# Altium PCB POWER.PcbDoc
Units mil, origin at the board's own origin, x right, y up, seen from the top; angles counter-clockwise.
Board outline 1065 x 2395 mil, 2 copper layers (Top Layer, Bottom Layer); 27 components, 25 nets, 139 pads, 8 vias.
Unrouted connection lines stored in the file: 2.
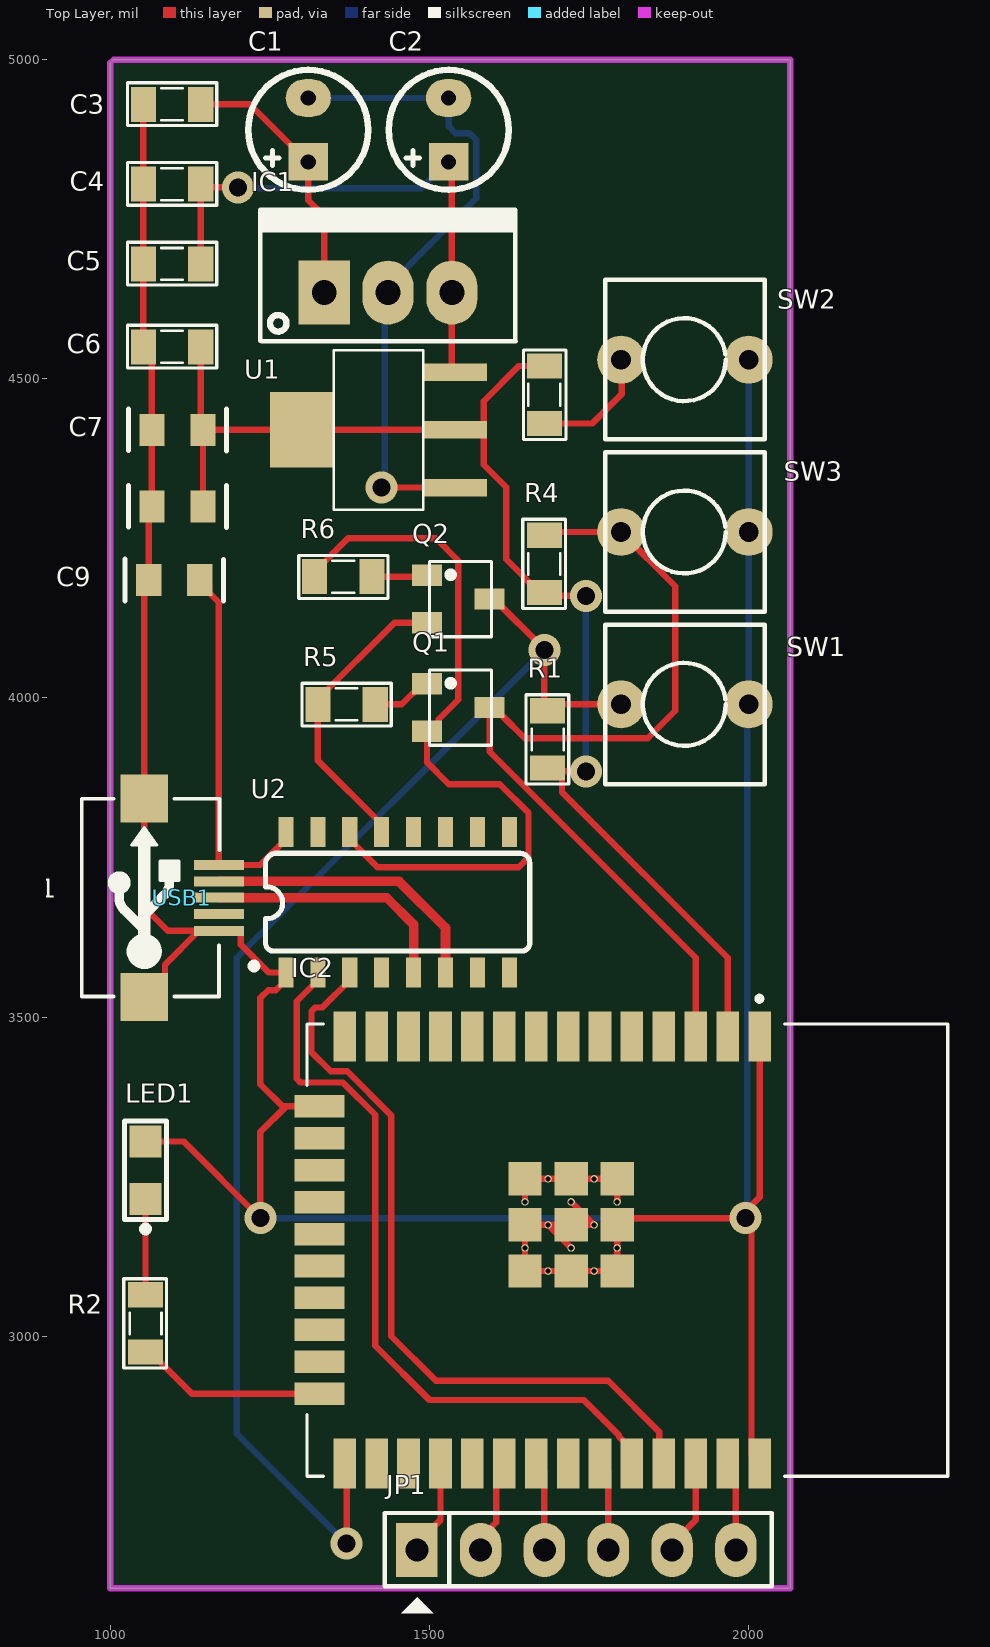
[diagram p0: Top Layer view]
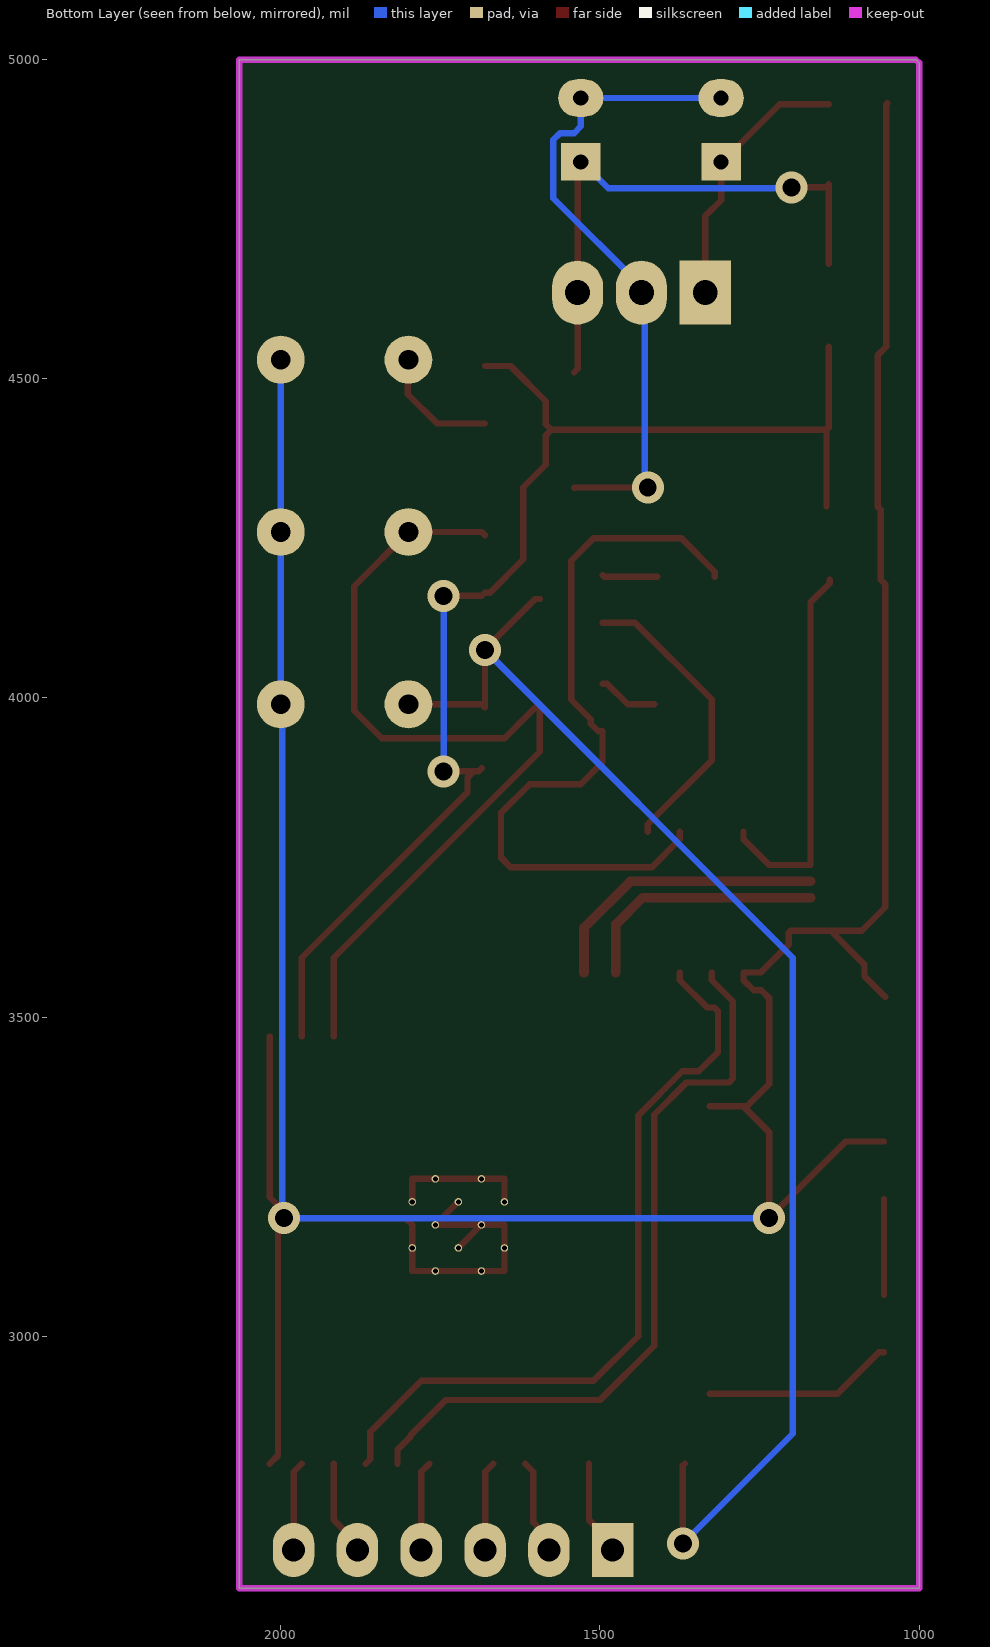
[diagram p1: Bottom Layer view, seen from below]
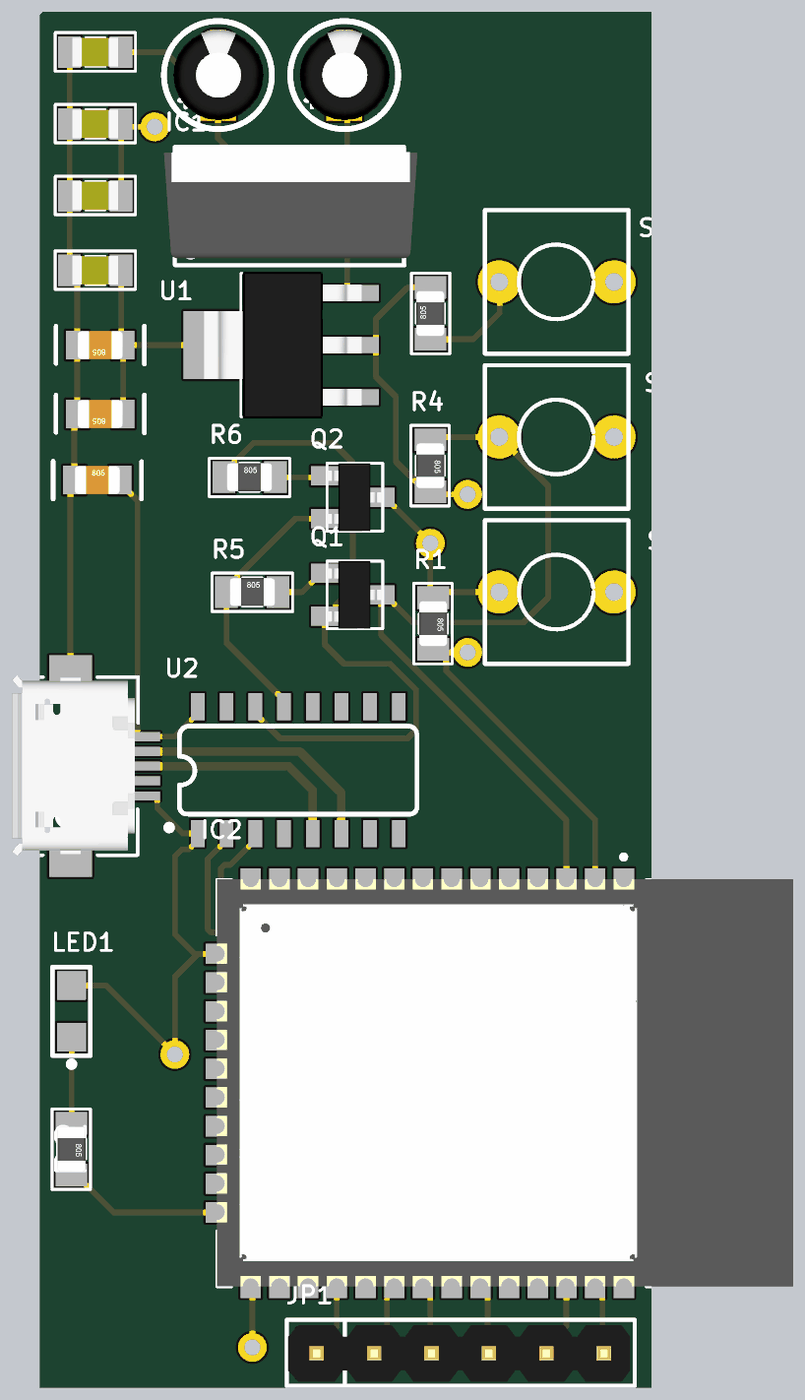
[diagram p2: 3D render of the assembled board from above, using the file's embedded part models]

## Layer stack, top to bottom
Top Solder: solder mask 0.4, Solder Resist, Dk 3.5
Top Layer: signal copper 1.4
Dielectric 1: dielectric 12.6, FR-4, Dk 4.8
Bottom Layer: signal copper 1.4
Bottom Solder: solder mask 0.4, Solder Resist, Dk 3.5

## Board outline
1000,2605 1000,4995 1005,5000 2065,5000 2065,2605

## Design rules (kind name [scope] priority, off if disabled: settings)
Clearance [All] p1: gap=7 ignorepadtopadclearanceinfootprint=TRUE
DiffPairsRouting [All] p1: maxlimit=10 minlimit=10 mostfreqgap=10 toplayer_minwidth=15 toplayer_maxwidth=15 toplayer_prefwidth=15 bottomlayer_minwidth=15 bottomlayer_maxwidth=15 bottomlayer_prefwidth=15 maxuncoupledlength=500
PolygonConnect [All] p1: connectstyle=Relief reliefconductorwidth=10 reliefentries=4 polygonreliefangle="90 Angle" airgapwidth=10
RoutingVias [All] p1: holewidth=28 width=50 viastyle="Through Hole" minholewidth=28 minwidth=50 maxholewidth=28 maxwidth=50
SolderMaskExpansion [All] p1: expansion=4 istentingtop=FALSE
Width [All] p1: maxlimit=10 minlimit=10 preferedwidth=10
29 further rules are at their usual default settings.

## Classes and differential pairs
differential pair class diff: D0
differential pair D0: +D0_P -D0_N

## Components (designator, comment, footprint, x,y, rotation, side; value= is the part's Value field where it differs from the comment)
C1 "25V/10uF" C3MM 1310,4890 r90 top
C2 "10V/1uF" C3MM 1530,4890 r90 top
C3 "100nF" CAP_0805 1096.56,4930 r180 top value=33p
C4 "100nF" CAP_0805 1096.56,4805 r180 top value=33p
C5 "10uF" CAP_0805 1096.56,4680 r180 top value=33p
C6 "22uF" CAP_0805 1096.56,4550 r180 top value=33p
C7 "10uF" C0805 1105,4420 r180 top value=33p
C8 "10uF" C0805 1105,4300 r180 top value=33p
C9 "100nF" C0805 1100,4185 r0 top value=33p
IC1 "LM7805" QTO-220 1335,4635 r0 top
IC2 "ESP32-WROOM-32" MODULE_ESP32-WROOM-32 1810,3135 r270 top
JP1 "JP6 PIN" JP6 1480,2665 r0 top value=JP7
LED1 "LED" LED0805 1055,3260 r90 top value="LED 3 ly Single Colour"
Q1 "C1815" SOT23D 1545,3985 r270 top
Q2 "C1815" SOT23D 1545,4155 r270 top
R1 "10k" RES-SMD-0805 1685,3935 r270 top
R2 "Resistor - SMD" RES-SMD-0805 1055,3020 r270 top
R3 "10k" RES-SMD-0805 1680,4475 r90 top
R4 "10k" RES-SMD-0805 1680,4210 r270 top
R5 "10k" RES-SMD-0805 1370,3990 r0 top
R6 "10k" RES-SMD-0805 1365,4190 r0 top
SW1 "SW" SW2 1800,3990 r0 top value="SW chip 2 pin"
SW2 "SW" SW2 1800,4530 r0 top value="SW chip 2 pin"
SW3 "SW" SW2 1800,4260 r0 top value="SW chip 2 pin"
U1 "LM1117-ADJ" LM1117-SOP 1490,4420 r90 top
U2 "CH340C" SOP-16 1450,3680 r0 top
USB1 "USB" USB-M1 1170,3687 r90 top

## Footprints (in the part's own frame and the unit in brackets; to place one, negate y for a bottom-side part, rotate by r counter-clockwise, add the part's x,y. Pads: shape width x height; smd on the part's side, far side on the other; paste and mask are expansions set on the pad)
C3MM [mm]
  rect 1.5x1.58 hole 0.6: 1(-1.27,0)
  oval 1.5x1.8 hole 0.6: 2(1.27,0)
  silkscreen extent -2.39,-2.39 2.39,2.39, body extent -2,-2.03 1.99,1.97, height 7.01
C0805 [mil] "Chip Resistor; Body 2.0 x 1.3 mm (LxW typ)"
  rect 39.37x50 smd: 1(-40,0) 2(40,0)
  silkscreen extent -77,-33 77,33, body extent -39,-25 39,25, height 31
CAP_0805 [mil]
  rect 39.37x55 smd: 1(-45,0) 2(45,0)
  silkscreen extent -70,-34 70,33, body extent -40,-25 40,25, height 24
JP6 [mil] "JP6"
  rect 65x85 hole 36: 1(0,0)
  oval 65x85 hole 36: 2(100,0) 3(200,0) 4(300,0) 5(400,0) 6(500,0)
  silkscreen extent -50,-99 556,58, body extent -48,-50 548,48, height 323
LED0805 [mil] "Chip Resistor; Body 2.0 x 1.3 mm (LxW typ)"
  rect 50x50 smd: 1(-45,0) 2(45,0)
  silkscreen extent -97,-33 77,33, body extent -60,-25 60,25, height 47
LM1117-SOP [mm]
  rect 0.7x2.54 smd: 1(-2.3,-1.27) 2(0,-1.27) 3(2.3,-1.27)
  rect 3x2.54 smd: 2(0,4.826)
  silkscreen extent -3.18,0 3.17,3.56, body extent -3.25,-1.78 3.25,5.18, height 1.68
MODULE_ESP32-WROOM-32 [mm]
  rect 2x0.9 smd: 1(-8.5,5.26) 2(-8.5,3.99) 3(-8.5,2.72) 4(-8.5,1.45) 5(-8.5,0.18) 6(-8.5,-1.09) 7(-8.5,-2.36) 8(-8.5,-3.63) 9(-8.5,-4.9) 10(-8.5,-6.17) 11(-8.5,-7.44) 12(-8.5,-8.71) 13(-8.5,-9.98) 14(-8.5,-11.25) 25(8.5,-11.25) 26(8.5,-9.98) 27(8.5,-8.71) 28(8.5,-7.44) 29(8.5,-6.17) 30(8.5,-4.9) 31(8.5,-3.63) 32(8.5,-2.36) 33(8.5,-1.09) 34(8.5,0.18) 35(8.5,1.45) 36(8.5,2.72) 37(8.5,3.99) 38(8.5,5.26)
  rect 0.9x2 smd: 15(-5.715,-12.25) 16(-4.445,-12.25) 17(-3.175,-12.25) 18(-1.905,-12.25) 19(-0.635,-12.25) 20(0.635,-12.25) 21(1.905,-12.25) 22(3.175,-12.25) 23(4.445,-12.25) 24(5.715,-12.25)
  rect 1.33x1.33 smd: 39_1(-2.835,-0.405) 39_2(-1,-0.405) 39_3(0.835,-0.405) 39_4(-2.835,-2.24) 39_5(-1,-2.24) 39_6(0.835,-2.24) 39_7(-2.835,-4.075) 39_8(-1,-4.075) 39_9(0.835,-4.075)
  round 0.3 hole 0.2: 39_10(-1.917,-0.405) 39_11(-0.082,-0.405) 39_12(-2.835,-1.322) 39_13(-1,-1.322) 39_14(0.835,-1.322) 39_15(-1.917,-2.24) 39_16(-0.082,-2.24) 39_17(-2.835,-3.157) 39_18(-1,-3.157) 39_19(0.835,-3.157) 39_20(-1.917,-4.075) 39_21(-0.082,-4.075)
  silkscreen extent -10.1,-12.75 9,12.75, body extent -9.02,-12.75 8.98,12.75, height 3.2
QTO-220 [mil] "TO-220 - 1-2-3"
  rect 80x100 hole 39: 1(0,0)
  oval 80x100 hole 39: 2(100,0) 3(200,0)
  silkscreen extent -100,-76 300,130, body extent -119,-64 322,121, height 755
RES-SMD-0805 [mil]
  rect 39.37x55 smd: 1(-45,0) 2(45,0)
  silkscreen extent -70,-34 70,33, body extent -39,-25 39,25, height 31
SOP-16 [mm]
  rect 0.6x1.2 smd: 1(-4.445,-2.8) 2(-3.175,-2.8) 3(-1.905,-2.8) 4(-0.635,-2.8) 5(0.635,-2.8) 6(1.905,-2.8) 7(3.175,-2.8) 8(4.445,-2.8) 9(4.445,2.8) 10(3.175,2.8) 11(1.905,2.8) 12(0.635,2.8) 13(-0.635,2.8) 14(-1.905,2.8) 15(-3.175,2.8) 16(-4.445,2.8)
  silkscreen extent -5.84,-2.67 5.26,1.95, body extent -4.95,-3.47 4.95,3.47, height 1.75
SOT23D [mm] "SOT 23C - 1-3-2 - BCE"
  rect 0.85x1.2 smd: 1(-0.95,-1.25) 2(0.94,-1.245) 3(0,1.25)
  silkscreen extent -1.5,-1.14 1.5,1.32, body extent -1.5,-1.17 1.5,1.33, height 1.06
SW2 [mil] "SW button 2pin, 250x 250 mil"
  round 75 hole 31: 1(0,0) 2(200,0)
  silkscreen extent -25,-125 225,125
USB-M1 [mm]
  rect 0.4x2 smd: 1(1.3,0) 2(0.65,0) 3(0,0) 4(-0.65,0) 5(-1.321,0)
  rect 1.9x1.9 smd: 5(-3.95,2.968) 5(3.95,2.968)
  silkscreen extent -3.94,-0.03 3.94,5.46, body extent -3.98,0.11 4,5.54, height 2.71

## Part data
C1 C2: library part "Cap Pol", "Polarized Capacitor (Axial)", LatestRevisionDate=17-Jul-2002, LatestRevisionNote="Re-released for DXP Platform.", PackageReference=POLAR0.8, Published=8-Jun-2000, Publisher="Altium Limited"
C3 C4 C5 C6 C7 C8 C9: library part CapSMD, "Capacitor", LatestRevisionDate=17-Jul-2002, LatestRevisionNote="Re-released for DXP Platform.", PackageReference=RAD-0.3, Published=8-Jun-2000, Publisher="Altium Limited"
IC1: library part LM78xx, "On ap +, from + 5 to + 24VDC"
IC2: "Bluetooth, WiFi Transceiver Module 2.4GHz ~ 2.5GHz Surface Mount", Package="Module Espressif Systems", Digi-Key_Part_Number=1904-1010-1-ND, Digi-Key_Purchase_URL=https://www.digikey.com/product-detail/en/espressif-systems/ESP32-WROOM-32/1904-1010-1-ND/8544305?utm_source=snapeda&utm_medium=aggregator&utm_campaign=symbol, MF="Espressif Systems", MP=ESP32-WROOM-32, SnapEDA_Link=https://www.snapeda.com/parts/ESP32-WROOM-32/Espressif%20Systems/view-part/2753322/?ref=snap
JP1: library part JP6
LED1: "LED Single colour Green and Red"
Q1 Q2: library part 2SC1815, "NPN 600mW, ECB"
R1 R3 R4 R5 R6: library part "Resistor - SMD", "Resistor", Manufacturer="Generic Components", Class=Passive, Published=08/06/2000, Publisher="Altium Hobart Technology Centre"
R2: "Resistor SMD", Manufacturer="Generic Components", Class=Passive, Published=08/06/2000, Publisher="Altium Hobart Technology Centre"
SW1 SW2 SW3: library part SW2, "Switch button 2 pin"
U1: "800mA Low-Dropout Linear Regulator", Creator="Nguyen Ba Bien", Website=http://group3i.net
U2: "USB to serial chip CH340", Package=Package, Availability=Unavailable, Check_prices=https://www.snapeda.com/parts/CH340C/WCH/view-part/5428851/?ref=eda, MF=WCH, MP=CH340C, Price=None, SnapEDA_Link=https://www.snapeda.com/parts/CH340C/WCH/view-part/5428851/?ref=snap
USB1: library part USB-M

## Via types
v1: diameter 50, hole 28, Top Layer to Bottom Layer, 8 vias

## Nets (pads, with @x,y where several pads share a name; then routed paths per layer and width w, separated by ;. In a path a pad name is that pad's centre, name@x,y a point inside that pad or via, vN(x,y) a via of type N, cw(c..) or ccw(c..) an arc to the next point about the centre after c; other vN are vias at no path point)
3V3: C6.1 C7.1 C8.1 IC2.2 R1.2 R3.2 R4.2 U1.2 | length 2082.7
  Top Layer w10: C6.1 1141.56,4423.44 C7.1 ; C8.1 C7.1 ; R3.2 1640,4520 1585,4465 1585,4428.78 U1.2@1576.22,4420 ; R1.2 1690,3885 R1.2@1697.81,3885 ; v1(1745,3885) R1.2@1697.81,3885 ; v1(1745,4160) 1685,4160 R4.2 1672.19,4165 1620,4217.19 1620,4330.2 1585,4365.2 1585,4411.22 U1.2@1576.22,4420 ; IC2.2 1967.09,3592.91 1707.5,3852.5 1707.5,3875.31 R1.2@1697.81,3885 ; C7.1 1300,4420 1540,4420 U1.2@1576.22,4420
  Bottom Layer w10: v1(1745,3885) v1(1745,4160)
5V: C2.1 C4.1 C5.1 IC1.3 U1.3 | length 866.9
  Top Layer w10: C5.1 C4.1 1146.56,4800 v1(1200,4800) ; C2.1 1535,4835 IC1.3 1535,4515.55 U1.3
  Bottom Layer w10: v1(1200,4800) 1201.53,4798.47 1486.9,4798.47 1528.43,4840 C2.1
12V: C1.1 C3.1 IC1.1 | length 421.1
  Top Layer w10: C3.1 1218.43,4930 1308.43,4840 C1.1 1310,4780 1335,4755 IC1.1
D0_N: U2.5 USB1.3 | length 397.6
  Top Layer w15: USB1.3 1433,3687 1475,3645 U2.5
D0_P: U2.6 USB1.2 | length 455.3
  Top Layer w15: USB1.2 1452.41,3712.59 1525,3640 U2.6
DTR: Q2.2 R5.1 U2.13 | length 469.8
  Top Layer w10: U2.13 1425,3802.05 1325,3902.05 R5.1 1325,3997.81 1445.18,4118 Q2.2
EN: IC2.3 Q1.3 R4.1 SW3.1 | length 1414.9
  Top Layer w10: R4.1 1685,4260 SW3.1 1885,4175 1885,3980 1842,3937 1649.1,3937 1612.84,3973.27 1601.1,3985 Q1.3 1594.21,3915.79 1917.09,3592.91 IC2.3
GND: C1.2 C2.2 C3.2 C4.2 C5.2 C6.2 C7.2 C8.2 C9.1 IC1.2 IC2.1 IC2.15 IC2.38 IC2.39_1 IC2.39_2 IC2.39_3 IC2.39_4 IC2.39_5 IC2.39_6 IC2.39_7 IC2.39_8 IC2.39_9 IC2.39_10 IC2.39_11 IC2.39_12 IC2.39_13 IC2.39_14 IC2.39_15 IC2.39_16 IC2.39_17 IC2.39_18 IC2.39_19 IC2.39_20 IC2.39_21 LED1.2 SW1.2 SW2.2 SW3.2 U1.1 U2.1 USB1.5 | length 7141.1
  Top Layer w10: C3.2@1050,4931.56 C3.2 C4.2 C5.2 C6.2 1065,4536.56 C7.2 C8.2 1060,4295 C9.1 1053.16,4178.16 1053.16,3842.51 1053.16,3671.84 1090,3635 USB1.5@1138.5,3635 ; USB1.5@1053.16,3531.49 1085.56,3563.89 1085.56,3582.06 USB1.5@1138.5,3635 ; LED1.2 1115,3305 v1(1235,3185) 1235,3320 1275,3360 ; IC2.15 1275,3360 ; v1(1425,4330) 1425.28,4329.72 1539.72,4329.72 U1.1 ; IC2.39_20 IC2.39_7 IC2.39_17 IC2.39_4 IC2.39_12 IC2.39_1 IC2.39_10 ; IC2.39_16 IC2.39_18 ; IC2.39_15 IC2.39_13 IC2.39_5 IC2.39_18 ; v1@2004.37,3164.81 2004.37,2813.07 IC2.38 ; IC2.1 2017.09,3217.91 1995,3195.82 v1(1995,3185) 1804.68,3185 IC2.39_2 IC2.39_11 IC2.39_3 IC2.39_14 IC2.39_6 IC2.39_19 IC2.39_9 IC2.39_21 IC2.39_8 IC2.39_18 ; USB1.5@1138.5,3635 1170,3635 1201.5,3635 1204.37,3632.13 1204.37,3613.58 1248.19,3569.76 U2.1 1275,3557.95 1259.1,3542.06 1247.06,3542.06 1235,3530 1235,3395 1270,3360 1275,3360
  Bottom Layer w10: v1(1235,3185) v1(1995,3185) 1997.5,3187.5 1997.5,3987.5 SW1.2 SW3.2 SW2.2 ; C1.2 C2.2 1530,4895.47 1540.49,4884.99 1562.62,4884.99 1573.1,4874.5 1573.1,4783.1 1435,4645 IC1.2 1430,4630 1430,4335 v1(1425,4330)
IO_0: IC2.25 Q2.3 R1.1 SW1.1 | length 2129.1
  Top Layer w10: IC2.25 1370,2797.44 v1(1370,2675) ; Q2.3 1601.1,4155 1680,4076.1 v1(1680,4075) 1680,3985 1685,3990 SW1.1
  Bottom Layer w10: v1(1370,2675) 1198,2847 1198,3593 v1(1680,4075)
IO_2: IC2.24 R2.2 | length 299.6
  Top Layer w10: R2.2 1062.81,2975 1127.81,2910 IC2.24
IO_16: R3.1 SW2.1 | length 194.4
  Top Layer w10: R3.1 1755,4430 1800.86,4475.86 1800.86,4529.14 SW2.1
NetIC2_28: IC2.28 JP1.1 | length 150.7
  Top Layer w10: JP1.1 1480,2675 1517.09,2712.09 IC2.28
NetIC2_30: IC2.30 JP1.2 | length 150.7
  Top Layer w10: JP1.2 1580,2683.99 1604.37,2708.36 1604.37,2787.64 IC2.30
NetIC2_31: IC2.31 JP1.3 | length 140.7
  Top Layer w10: IC2.31 1679.8,2787.64 1679.8,2665.2 JP1.3
NetIC2_33: IC2.33 JP1.4 | length 140.7
  Top Layer w10: IC2.33 1779.8,2787.64 1779.8,2665.2 JP1.4
NetIC2_36: IC2.36 JP1.5 | length 150.7
  Top Layer w10: JP1.5 1880,2675 1917.09,2712.09 IC2.36
NetIC2_37: IC2.37 JP1.6 | length 140.7
  Top Layer w10: IC2.37 1979.8,2787.64 1979.8,2665.2 JP1.6
NetLED1_1: LED1.1 R2.1 | length 150
  Top Layer w10: R2.1 LED1.1
NetQ1_1: Q1.1 R5.2 | length 94.2
  Top Layer w10: R5.2 1456.5,3990 1488.9,4022.4 Q1.1
NetQ2_1: Q2.1 R6.2 | length 86.8
  Top Layer w10: R6.2 1493.38,4190 Q2.1
RST: Q1.2 R6.1 U2.14 | length 1187
  Top Layer w10: R6.1 1320,4197.81 1372.18,4250 1510,4250 1545,4215 1545,3997 1514.62,3966.62 1514.62,3959.73 1502.89,3948 Q1.2 1496,3899 1530,3865 1610,3865 1655,3820 1655,3750 1640,3735 1418.43,3735 1375,3778.43 U2.14
RX: IC2.35 U2.3 | length 1202.8
  Top Layer w10: U2.3 1375,3557.95 1332.05,3515 1320.86,3515 1315,3509.14 1315,3445 1345.14,3414.86 1370.95,3414.86 1440,3345.82 1440,3000 1510,2930 1780,2930 1860,2850 1860,2807.44 IC2.35
TX: IC2.34 U2.2 | length 1180.9
  Top Layer w10: U2.2 1325,3557.95 1292,3524.95 1292,3403.36 1297.86,3397.5 1364.27,3397.5 1415,3346.77 1415,2985 1500,2900 1741.5,2900 1796.84,2844.65 1796.84,2842.25 1817.09,2822.01 IC2.34
V3: U2.4
VCC: C9.2 U2.16 USB1.1 | length 592.7
  Top Layer w10: C9.2 1140,4179.69 1170,4149.69 USB1.1 1234.76,3738.18 1275,3778.43 U2.16
pads on no net: IC2.4 IC2.5 IC2.6 IC2.7 IC2.8 IC2.9 IC2.10 IC2.11 IC2.12 IC2.13 IC2.14 IC2.16 IC2.17 IC2.18 IC2.19 IC2.20 IC2.21 IC2.22 IC2.23 IC2.26 IC2.27 IC2.29 IC2.32 U2.7 U2.8 U2.9 U2.10 U2.11 U2.12 U2.15 USB1.4

## Keep-outs
Keep-Out Layer:
  the board outline again, w10

## Text inside footprints (layer, text, board x,y; h text height)
IC2: Mechanical 13 "ANTENNA" at 2164.33,3371.22 h30 r270